# EAGLE board final (EAGLE 9.2.0)

Size 236.5 x 118.64 mm. Coordinates in mm from the lower left corner, seen from the top.
Outline: 76.5,18.64 236.5,18.64 236.5,118.64 76.5,118.64 76.5,18.64
Copper layers (1*16): Top 0.035mm / dielectric 1.5mm / Bottom 0.035mm
Design rules "default": minimum track width 6mil, minimum drill 0.35mm, track to track 6mil, track to pad 6mil, pad to pad 6mil, via to via 6mil, smd to smd 6mil, copper to edge 40mil, drill to drill 6mil, minimum pad ring 10mil, minimum via ring 8mil, stop-mask expansion 4mil, vias tented up to drill 0mil, thermal gap 10mil

## Footprints (pad centres in the part's own frame; a part is rotated, then mirrored left to right if it is on the bottom)
DEANS = drill 1.27 pad 3.556 long: + 0,0; - 0.737,-6.921
1X03 = drill 1.016 pad 1.88: 1 0,0; 2 2.54,0; 3 5.08,0
1X09 = drill 1.016 pad 1.88: 1 0,0; 2 2.54,0; 3 5.08,0; 4 7.62,0; 5 10.16,0; 6 12.7,0; 7 15.24,0; 8 17.78,0; 9 20.32,0
1X04 = drill 1.016 pad 1.88: 1 0,0; 2 2.54,0; 3 5.08,0; 4 7.62,0
DIL16 = drill 0.813 long: 1 -8.89,-3.81; 2 -6.35,-3.81; 3 -3.81,-3.81; 4 -1.27,-3.81; 5 1.27,-3.81; 6 3.81,-3.81; 7 6.35,-3.81; 8 8.89,-3.81; 9 8.89,3.81; 10 6.35,3.81; 11 3.81,3.81; 12 1.27,3.81; 13 -1.27,3.81; 14 -3.81,3.81; 15 -6.35,3.81; 16 -8.89,3.81
NANO = drill 0.8 long: 3.3V -10.16,24.13; 5V -10.16,-1.27; A0 -10.16,19.05; A1 -10.16,16.51; A2 -10.16,13.97; A3 -10.16,11.43; A4 -10.16,8.89; A5 -10.16,6.35; A6 -10.16,3.81; A7 -10.16,1.27; AREF -10.16,21.59; D2 5.08,1.27; D3 5.08,3.81; D4 5.08,6.35; D5 5.08,8.89; D6 5.08,11.43; D7 5.08,13.97; D8 5.08,16.51; D9 5.08,19.05; D10 5.08,21.59; D11 5.08,24.13; D12 5.08,26.67; D13 -10.16,26.67; GND -10.16,-6.35; GND1 5.08,-1.27; RAW -10.16,-8.89; RST -10.16,-3.81; RST1 5.08,-3.81; RX1 5.08,-6.35; TX0 5.08,-8.89 | drill 0.8: ICSP1 -5.08,-10.16; ICSP2 -5.08,-7.62; ICSP3 -2.54,-10.16; ICSP4 -2.54,-7.62; ICSP5 0,-10.16; ICSP6 0,-7.62

## Placement (x,y rotation side)
CONN_DEANS  [DEANS]  2.84,9.75 0 top
J1  [1X03]  0.3,-4.22 0 top  (outside the outline)
J2  [1X09]  0.3,-8.03 0 top  (outside the outline)
J3  [1X04]  0.3,-11.84 0 top  (outside the outline)
L293D  L293D  [DIL16]  43.48,94.84 0 top
MOTORS  [1X04]  9.19,16.1 0 top
U$1  NANO  [NANO]  56.18,30.07 0 top

## Library data of the parts
CONN_DEANS = SparkFun-Connectors; SF_ID: PRT-11864
J1 J2 = SparkFun-Connectors
J3 MOTORS = SparkFun-Connectors; PROD_ID: CONN-09696
L293D = st-microelectronics; MPN: L293D; OC_FARNELL: 9589619; OC_NEWARK: 56P8249
U$1 = Arduino-clone

## Nets
EN1-2: L293D.1
EN3-4: L293D.9
GND: CONN_DEANS.- L293D.4 L293D.5 L293D.12 L293D.13 U$1.GND
GND-LEFT: L293D.6 MOTORS.3
GND-RIGHT: L293D.11 MOTORS.2
IN1: L293D.2
IN2: L293D.7
IN3: L293D.10
IN4: L293D.15
V+: CONN_DEANS.+ L293D.8 U$1.RAW
VCC: L293D.16 U$1.5V
VCC-LEFT: L293D.3 MOTORS.4
VCC-RIGHT: L293D.14 MOTORS.1

## Tracks (layer width: path | path; a pad name or v marks a point on that pad's centre or on a via)
GND  (5 unrouted)
GND-LEFT  (1 unrouted)
GND-RIGHT  (1 unrouted)
V+  (2 unrouted)
VCC  (1 unrouted)
VCC-LEFT  (1 unrouted)
VCC-RIGHT  (1 unrouted)